# Altium PCB emitter.PcbDoc
Units mm, origin at the board's own origin, x right, y up, seen from the top; angles counter-clockwise.
Board outline 58.42 x 37.46 mm, 2 copper layers (Top Layer, Bottom Layer), stack 1.671 mm thick; 8 components, 15 nets, 23 pads, 6 vias.
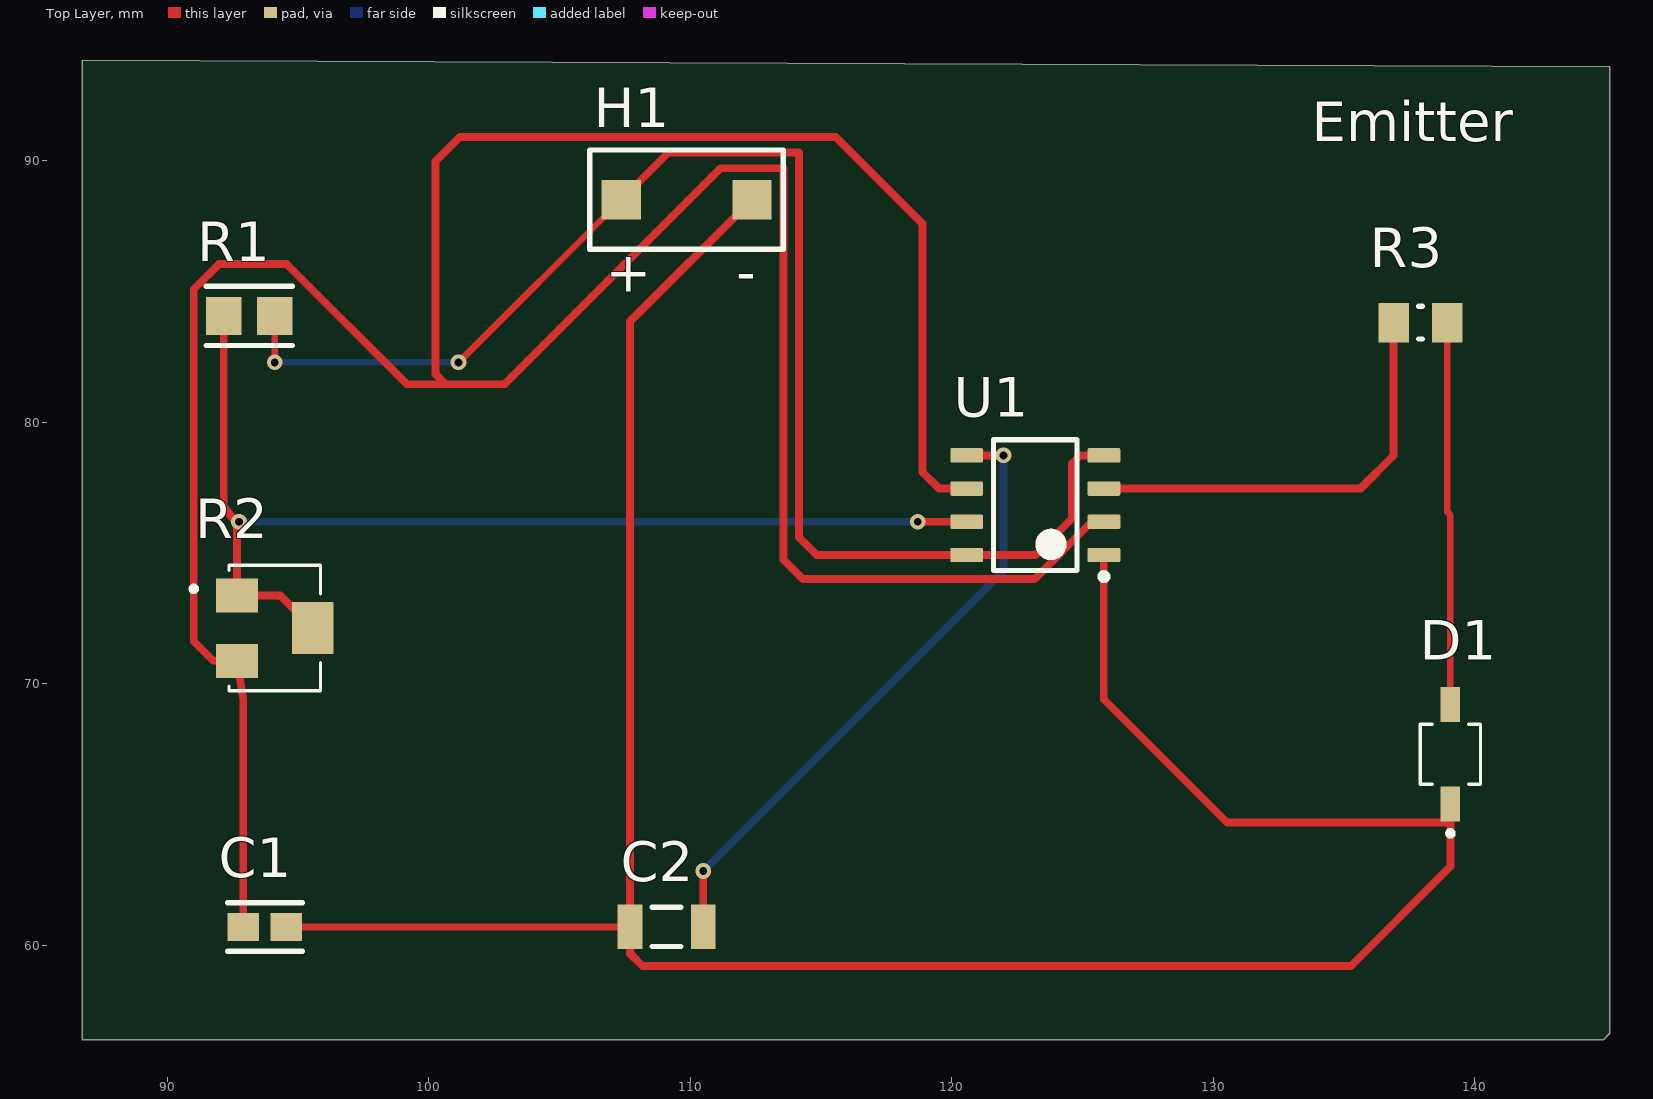
[diagram p0: Top Layer view]
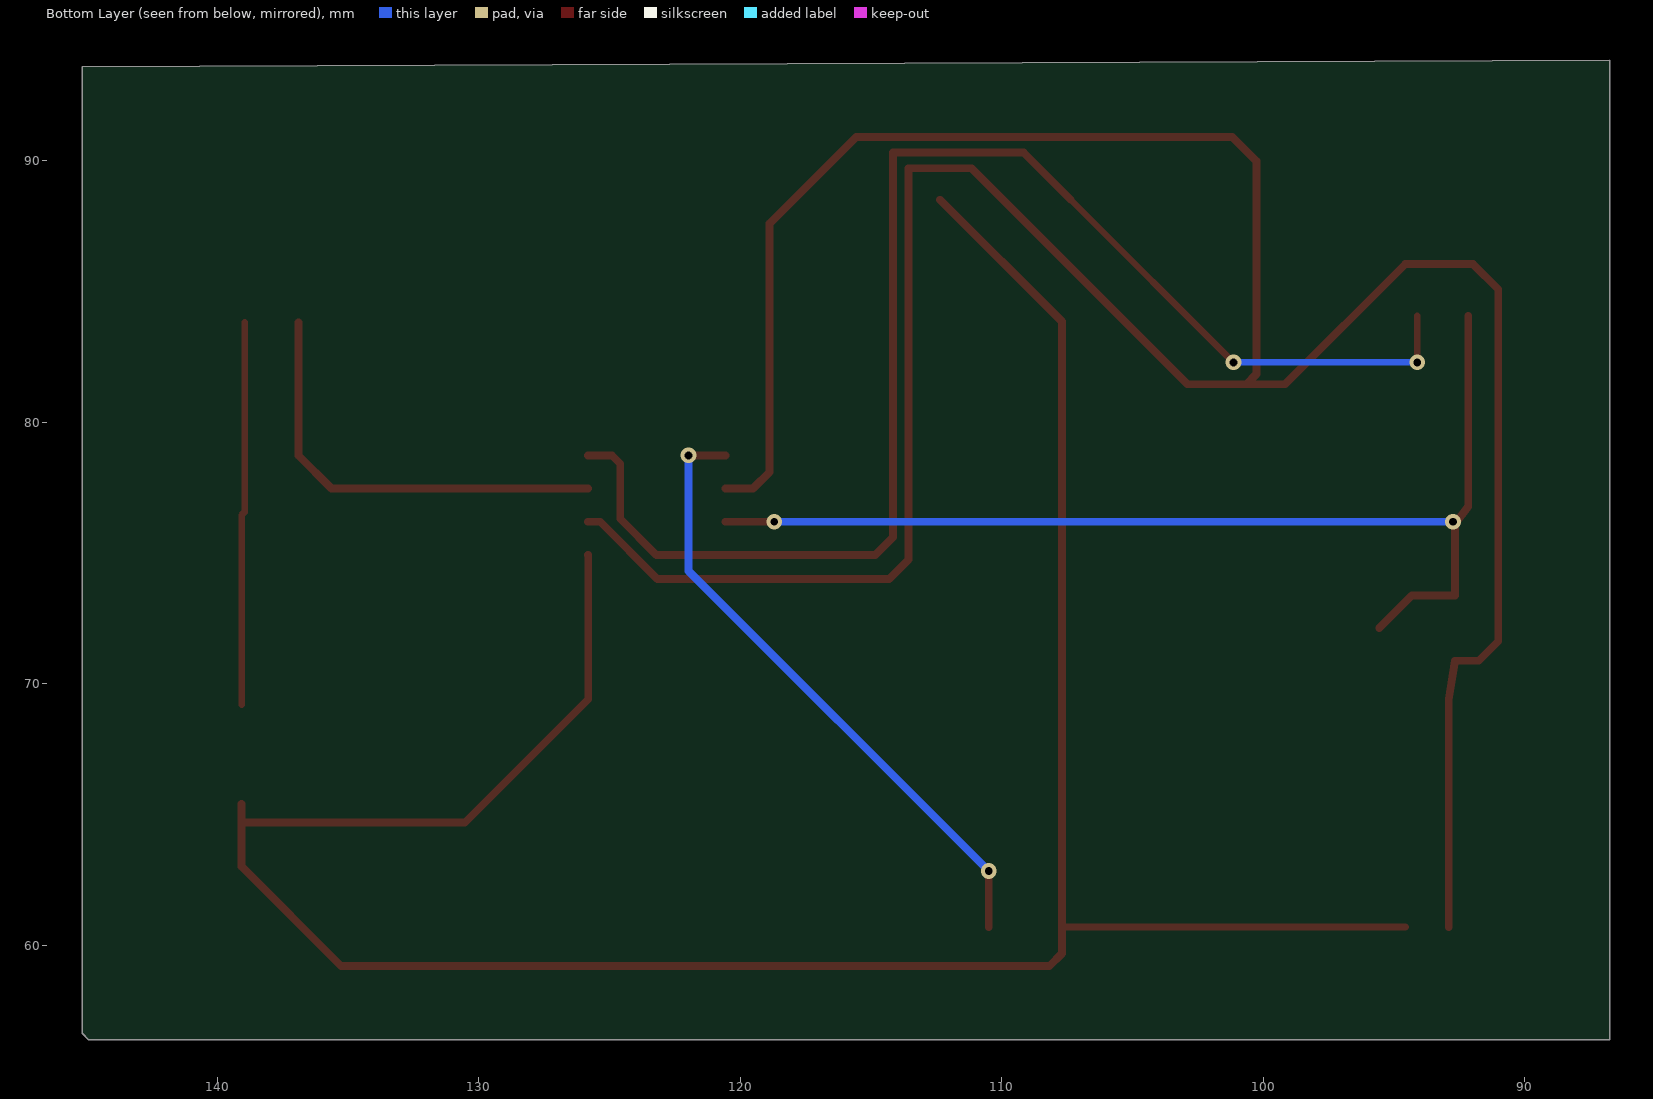
[diagram p1: Bottom Layer view, seen from below]
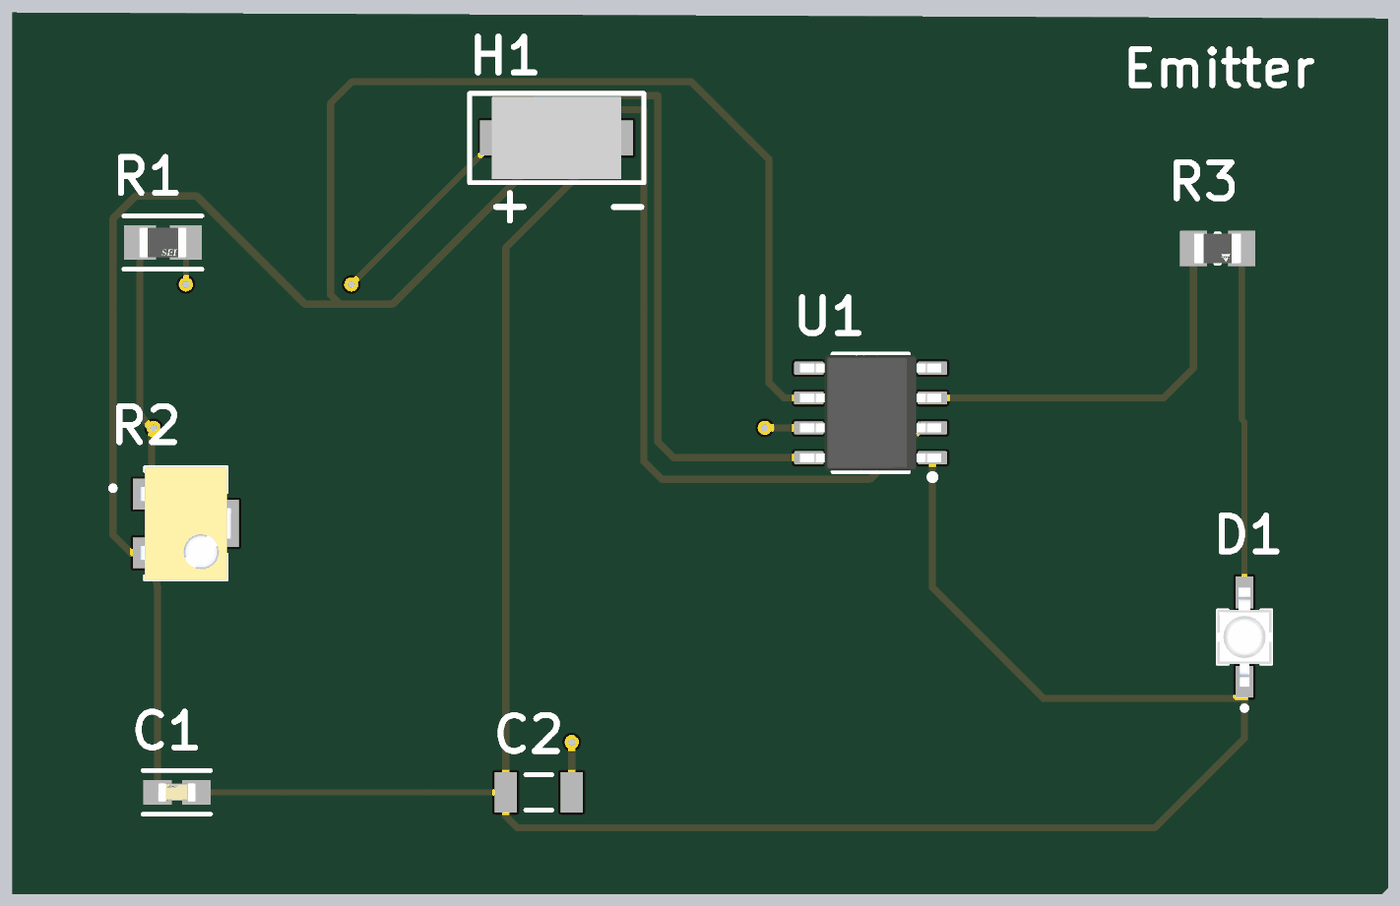
[diagram p2: 3D render of the assembled board from above, using the file's embedded part models]

## Layer stack, top to bottom
Top Solder: solder mask 0.0102, Solder Resist, Dk 3.5
Top Layer: signal copper 0.0356
Dielectric 1: dielectric 1.6, FR-4, Dk 4.8
Bottom Layer: signal copper 0.0356
Bottom Solder: solder mask 0.0102, Solder Resist, Dk 3.5

## Board outline
86.741,93.853 86.741,56.388 144.907,56.388 145.161,56.642 145.161,93.599

## Design rules (kind name [scope] priority, off if disabled: settings)
Clearance [All] p1: gap=0.3 ignorepadtopadclearanceinfootprint=FALSE
PolygonConnect [All] p1: connectstyle=Relief reliefconductorwidth=0.254 reliefentries=4 polygonreliefangle="90 Angle" airgapwidth=0.254
RoutingVias [All] p1: holewidth=0.3 width=0.6 viastyle="Through Hole" minholewidth=0.3 minwidth=0.6 maxholewidth=0.3 maxwidth=0.6
SolderMaskExpansion [All] p1: expansion=0.102 istentingtop=FALSE
Width [All] p1: maxlimit=1 minlimit=0.3 preferedwidth=0.3
30 further rules are at their usual default settings.

## Components (designator, comment, footprint, x,y, rotation, side; value= is the part's Value field where it differs from the comment)
C1 "0.047pF" C0603C473M5RAC7867 93.726,60.706 r0 top value="47,000 pF"
C2 "0.01uF" CAPC1206(3216)100_L 109.093,60.706 r0 top value=10nF
D1 "LED" DIO_VSMY2853G 139.065,67.31 r90 top
H1 "battery" bat 109.855,88.519 r0 top
R1 "10k" FP-RMCF0805-IPC_A 93.131,84.074 r0 top
R2 "50k" TRIM_PVG5A503C03R00 94.107,72.136 r0 top
R3 "220" FP-MCU0805-IPC_A 137.922,83.82 r0 top
U1 "NE555" D0008A_L 123.19,76.835 r180 top

## Footprints (in the part's own frame and the unit in brackets; to place one, negate y for a bottom-side part, rotate by r counter-clockwise, add the part's x,y. Pads: shape width x height; smd on the part's side, far side on the other; paste and mask are expansions set on the pad)
bat [mm]
  rect 1.5x1.5 smd: 1(-2.5,0) 2(2.5,0)
  silkscreen extent -3.7,-1.9 3.7,1.9, body extent -2.75,-1.75 2.75,1.75, height 7
C0603C473M5RAC7867 [mil]
  rect 47.5x41.66 smd paste+0 mask+0: 1(-32.51,0) 2(32.51,0)
  silkscreen extent -56,-37 56,37, body extent -76,-41 76,41, height 10
CAPC1206(3216)100_L [mm] "Chip Capacitor, Body 3.2x1.6mm, Height 1mm, IPC High Density"
  rect 0.95x1.7 smd: 1(-1.4,0) 2(1.4,0)
  silkscreen extent -0.55,-0.75 0.55,0.75, body extent -1.7,-0.9 1.7,0.9, height 1
D0008A_L [mm] "SOIC, 8-Leads, Body 5x4mm, Pitch 1.27mm, IPC High Density"
  rrect18% 1.25x0.55 smd: 1(-2.625,1.905) 2(-2.625,0.635) 3(-2.625,-0.635) 4(-2.625,-1.905) 5(2.625,-1.905) 6(2.625,-0.635) 7(2.625,0.635) 8(2.625,1.905)
  silkscreen extent -2.75,-2.5 1.6,2.85, body extent -3,-2.45 3,2.45, height 1.63
DIO_VSMY2853G [mm]
  rect 1.35x0.75 smd: 1(-1.9,0) 2(1.9,0)
  silkscreen extent -3.12,-1.15 1.15,1.15, body extent -2.1,-1.15 2.1,1.15, height 2.8
FP-MCU0805-IPC_A [mm]
  rect 1.159x1.508 smd paste+0 mask+0: 1(-1.027,0) 2(1.027,0)
  silkscreen extent -0.07,-0.62 0.07,0.62, body extent -2.11,-1.25 2.11,1.25, height 0.25
FP-RMCF0805-IPC_A [mm]
  rect 1.355x1.462 smd paste+0 mask+0: 1(-0.976,0) 2(0.976,0)
  silkscreen extent -1.65,-1.13 1.65,1.13, body extent -2.15,-1.23 2.15,1.23, height 0.25
TRIM_PVG5A503C03R00 [mm]
  rect 1.6x1.3 smd: 1(-1.45,1.25) 3(-1.45,-1.25)
  rect 1.6x2 smd: 2(1.45,0)
  silkscreen extent -3.2,-2.4 1.75,2.4, body extent -1.95,-2.4 1.95,2.4, height 5.3

## Part data
C1: library part C0603C473M5RAC7867, "CAP CER 0.047UF 50V X7R 0603", Capacitance="47,000 pF", Manufacturer=KEMET, Package=C0603C-CF, Supplier Part Number 1=399-14294-1-ND, Temperature="-55°C to +125°C", Temperature Characteristic=X7R, Temperature Coefficient=30ppm/°C, Temperature Range High=+125°C, Temperature Range Low=-55°C, Tolerance=0.2, Voltage Rating="50 V", Automotive=Yes, Automotive Grade="Grade 1", Category="Ceramic Capacitors", ComponentLink2Description=Datasheet, ComponentLink2URL=https://api.kemet.com/component-edge/download/datasheet/C0603C100J5GACAUTO.pdf, Device Class L1="Passive Components", Device Class L2=Capacitors, Device Class L3="Ceramic Capacitors", Digikey Description="CAP CER 0.047UF 50V X7R 0603", Height=0.87mm, Lead Free=Yes, Manufacturer Part Number=C0603C473M5RAC7867, Material=Ceramic, Octopart=https://octopart.com/c0603c473m5rac7867-kemet-1577561, RoHS=TRUE, Supplier 1=Digi-Key
C2: library part C1206C103K5RAC7025, "Cap Ceramic 0.01uF 50V X7R 10% SMD 1206 125°C Plastic T/R", Case-EIA=1206, Case-Metric=3216, Rated Voltage="50 V", Supplier Part Number 1=399-17657-1-ND, Tolerance=Â±10%, Category="Ceramic Capacitors", Max Thickness="1 mm", Supplier 1=Digi-Key, Technology=SMT
D1: library part VSMY2853G, "850 nm 100 mA Â±28Â° Surface Mount High Speed Infrared Emitting Diode", Package=None, Supplier Part Number 1=VSMY2853GCT-ND, Availability=Unavailable, Category="LED Emitters - Infrared, UV, Visible", MP=VSMY2853G, Price=None, Supplier 1=Digi-Key
R1: library part RMCF0805JT10K0, "10kΩ ±5% 0.125W 0805 Thick Film Chip Resistor AEC-Q200 compliant", Case Code (Imperial)=0805, Case Code (Metric)=2012, Max Operating Temperature=155°C, Max Power Dissipation=125mW, Min Operating Temperature=-55°C, Resistance=10kR, Resistor Type="Thick Film", Supplier Part Number 1=RMCF0805JT10K0CT-ND, Temperature Coefficient=100ppm/°C, Tolerance=5%, Case/Package=0805, Category="Chip Resistor - Surface Mount", Construction=Rectangular, Contact Plating=Tin, Depth=1.25mm, Features="Automotive AEC-Q200", Height=0.026inch, Lead Free="Lead Free", Length=2mm, Military Standard=Not, Mount="Surface Mount", Number of Terminations=2, Packaging="Tape and Reel", Power Rating=125mW, Radiation Hardening=No, RoHS Compliant=Yes, Series=RMCF, Size Code=0805, Supplier 1=Digi-Key, Width=0.049inch
R2: library part PVG5A503C03R00, "50 kOhms 0.25W, 1/4W J Lead Surface Mount Trimmer Potentiometer Cermet 11 Turn Top Adjustment", Package="SMD-3 Bourns", Supplier Part Number 1=490-2673-1-ND, Category="Potentiometers, Variable Resistors", Digi-Key_Part_Number=490-2673-1-ND, MF=Bourns, MP=PVG5A503C03R00, SnapEDA_Link=https://www.snapeda.com/parts/PVG5A503C03R00/Bourns/view-part/1439221/?ref=snap, Supplier 1=Digi-Key
R3: library part MCU08050C2200FP500, "Res Thin Film 0805 220 Ohm 1% 1/8W 50ppm/C Molded SMD SMD Paper T/R", Case/Package=0805, Max Operating Temperature=125°C, Max Power Dissipation=200mW, Min Operating Temperature=-55°C, Package Quantity=5000, Resistance=220R, Supplier Part Number 1=749-1727-1-ND, Temperature Coefficient=50ppm/°C, Tolerance=1%, Category="Chip Resistor - Surface Mount", Composition="Thin Film", Contact Plating=Tin, Depth=1.25mm, Height=0.022inch, Lead Free="Lead Free", Length=0.079inch, Military Standard=Not, Number of Terminations=2, Packaging="Tape and Reel", Radiation Hardening=No, Supplier 1=Digi-Key, Width=0.049inch
U1: library part NE555D, "Precision Timer, 4.5 to 16 V, 0 to 70 degC, 8-Pin SOIC (D), Green (RoHS & no Sb/Br), Tube", Digital IC Case Style=SOIC, Frequency=500kHz, IC Temperature Range=Commercial, Manufacturer="Texas Instruments", Operating Frequency Max=0.5MHz, Operating Mode=Astable,Monostable, Operating Temperature Max=70°C, Operating Temperature Min=0°C, Operating Temperature Range=0°Cto+70°C, Package Description="8-Pin Small Outline Integrated Circuit, Body 4.9 x 3.9 mm, Pitch 1.27 mm", Package Reference=D8, Supplier Part Number 1=296-16792-ND, Supply Voltage Max=16V, Supply Voltage Min=4.5V, Supply Voltage Range=4.5Vto16V, Base Number=555, Category="Clock/Timing - Programmable Timers and Oscillators", Clock External Input=No, Datasheet URL=http://www.ti.com/general/docs/lit/getliterature.tsp?genericPartNumber=NE555&fileType=pdf, Datasheet Version="Rev. I, 09/2014", Device Marking=NE555D, IC Generic Number=555, Logic Function Number=555, Manufacturer URL=http://www.ti.com/, Mounting Technology=SurfaceMount, No. of Channels=1, No. of Pins=8, No. of Timers=1, Package / Case=SOIC, Package URL=http://www.ti.com/lit/ml/msoi002j/msoi002j.pdf, PartNumber=NE555, Supplier 1=Digi-Key, SVHC=NoSVHC(19-Dec-2012)

## Via types
v1: diameter 0.6, hole 0.3, Top Layer to Bottom Layer, 6 vias

## Nets (pads, with @x,y where several pads share a name; then routed paths per layer and width w, separated by ;. In a path a pad name is that pad's centre, name@x,y a point inside that pad or via, vN(x,y) a via of type N, cw(c..) or ccw(c..) an arc to the next point about the centre after c; other vN are vias at no path point)
GND: 
NetC1_1: C1.1 R2.3 U1.2 U1.6 | length 122.8
  Top Layer w0.3: C1.1 92.9,69.418 R2.3 91.757,70.886 91.008,71.635 91.008,85.09 91.973,86.055 94.564,86.055 99.162,81.458 100.647,81.458 ; U1.6 119.507,77.47 118.872,78.105 118.872,87.605 115.558,90.919 101.181,90.919 100.254,89.992 100.254,81.852 100.647,81.458 ; U1.2 125.349,76.2 123.165,74.016 114.3,74.016 113.555,74.761 113.555,89.719 111.15,89.719 102.889,81.458 100.647,81.458
NetC1_2: C1.2 C2.1 D1.1 H1.2 U1.1 | length 100.2
  Top Layer w0.254: C1.2 C2.1
  Top Layer w0.3: H1.2 107.693,83.857 C2.1 107.693,59.69 108.176,59.207 135.255,59.207 139.065,63.017 139.065,64.694 ; U1.1 125.806,74.93 125.806,69.418 130.531,64.694 139.065,64.694 ; D1.1 139.065,64.694
NetC2_2: C2.2 U1.5 | length 24.2
  Top Layer w0.3: C2.2 v1(110.493,62.843) ; U1.5 v1(121.971,78.74)
  Bottom Layer w0.3: v1(110.493,62.843) 121.971,74.32 v1(121.971,78.74)
NetC3_1: 
NetC4_2: 
NetC5_1: 
NetC5_2: 
NetD1_2: D1.2 R3.2 | length 14.7
  Top Layer w0.254: R3.2 138.949,76.57 139.065,76.454 D1.2
NetH1_1: H1.1 R1.2 U1.4 U1.8 | length 54.6
  Top Layer w0.254: v1(94.107,82.296) R1.2 ; v1(101.132,82.296) H1.1
  Top Layer w0.3: H1.1 109.155,90.319 114.155,90.319 114.155,75.608 114.833,74.93 U1.8 123.202,74.93 124.587,76.315 124.587,78.422 124.904,78.74 U1.4
  Bottom Layer w0.254: v1(94.107,82.296) v1(101.132,82.296)
NetH2_1: 
NetQ1_2: 
NetR1_1: R1.1 R2.1 R2.2 U1.7 | length 42.2
  Top Layer w0.3: R1.1 92.155,76.78 92.648,76.133 v1@92.657,76.122 ; v1(92.735,76.2) v1@92.657,76.122 ; R2.2 94.307,73.386 R2.1 v1@92.657,76.122 ; v1(118.694,76.2) U1.7
  Bottom Layer w0.3: v1(92.735,76.2) v1(118.694,76.2)
NetR3_1: R3.1 U1.3 | length 16.7
  Top Layer w0.3: U1.3 135.625,77.47 136.895,78.74 R3.1
NetR4_1: 

## Silkscreen, mask and mechanical layers (free items; w line width, h text height)
Top Overlay:
  text "Emitter" at 133.754,90.754 h1.52
  text "+" at 106.754,85 h1.52
  text "-" at 111.754,84.992 h1.52